# Altium PCB Mini_MP3.PcbDoc
Units mil, origin at the board's own origin, x right, y up, seen from the top; angles counter-clockwise.
Board outline 1320 x 1040 mil, 2 copper layers (Top Layer, Bottom Layer); 5 components, 5 nets, 23 pads, 0 vias.
Unrouted connection lines stored in the file: 2.
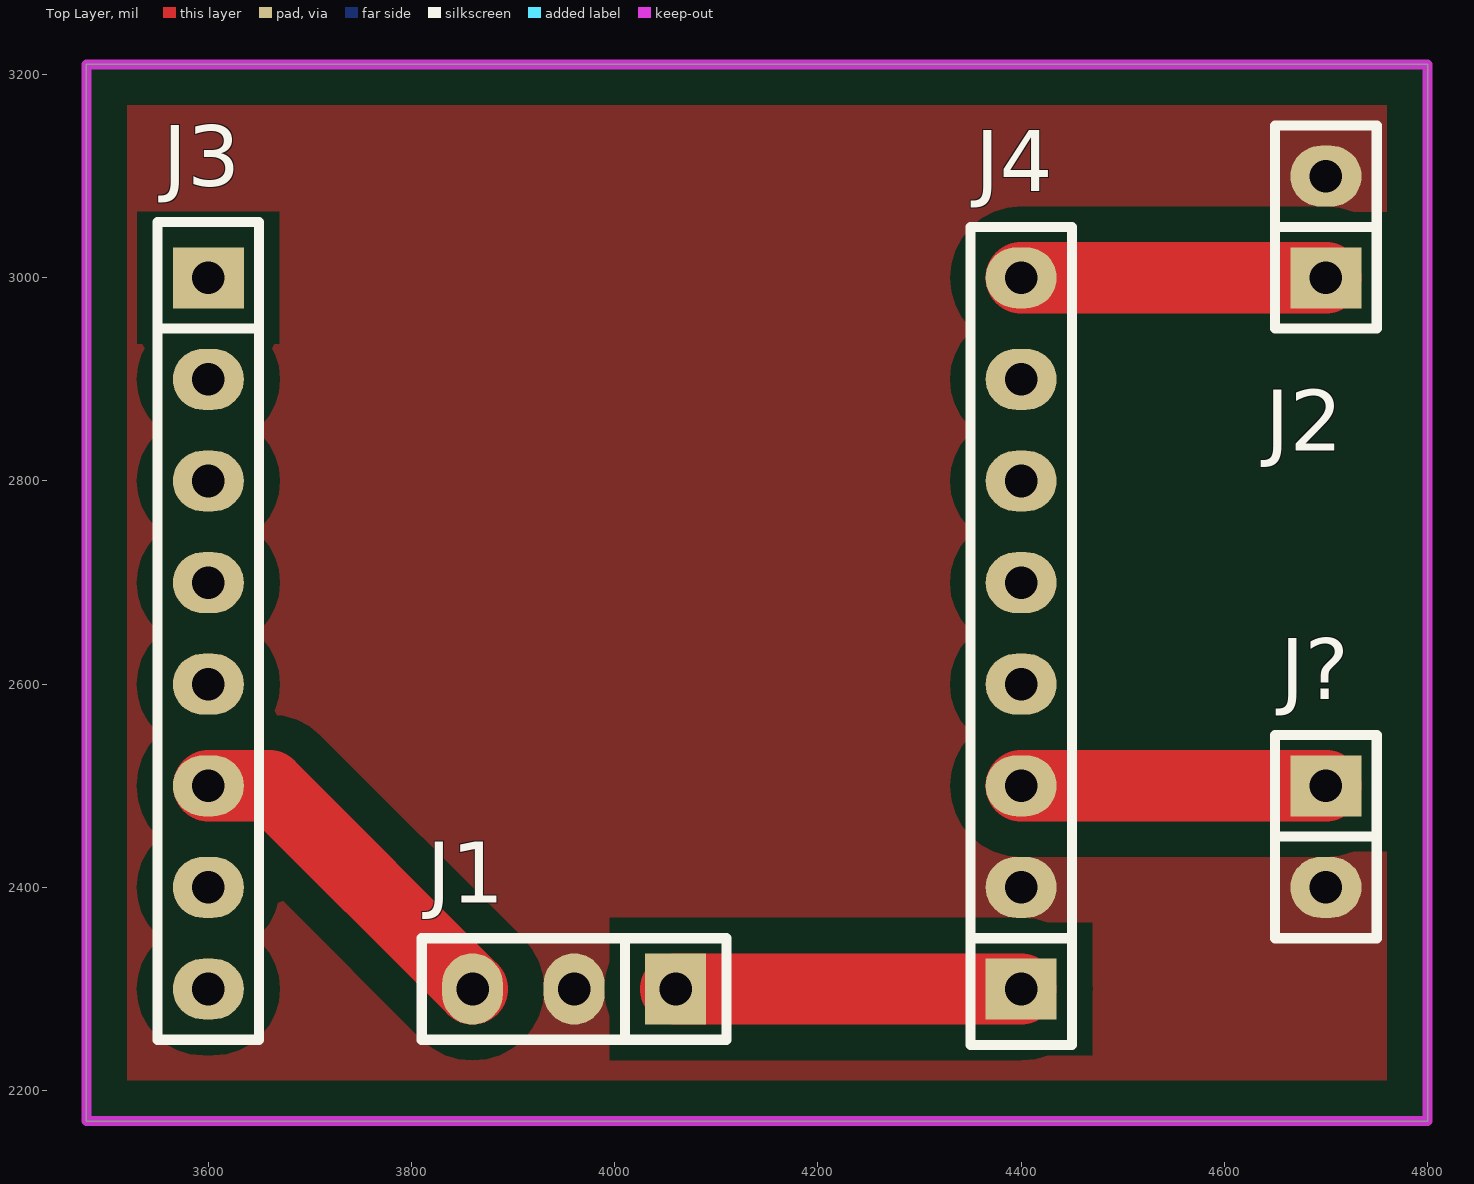
[diagram p0: Top Layer view]
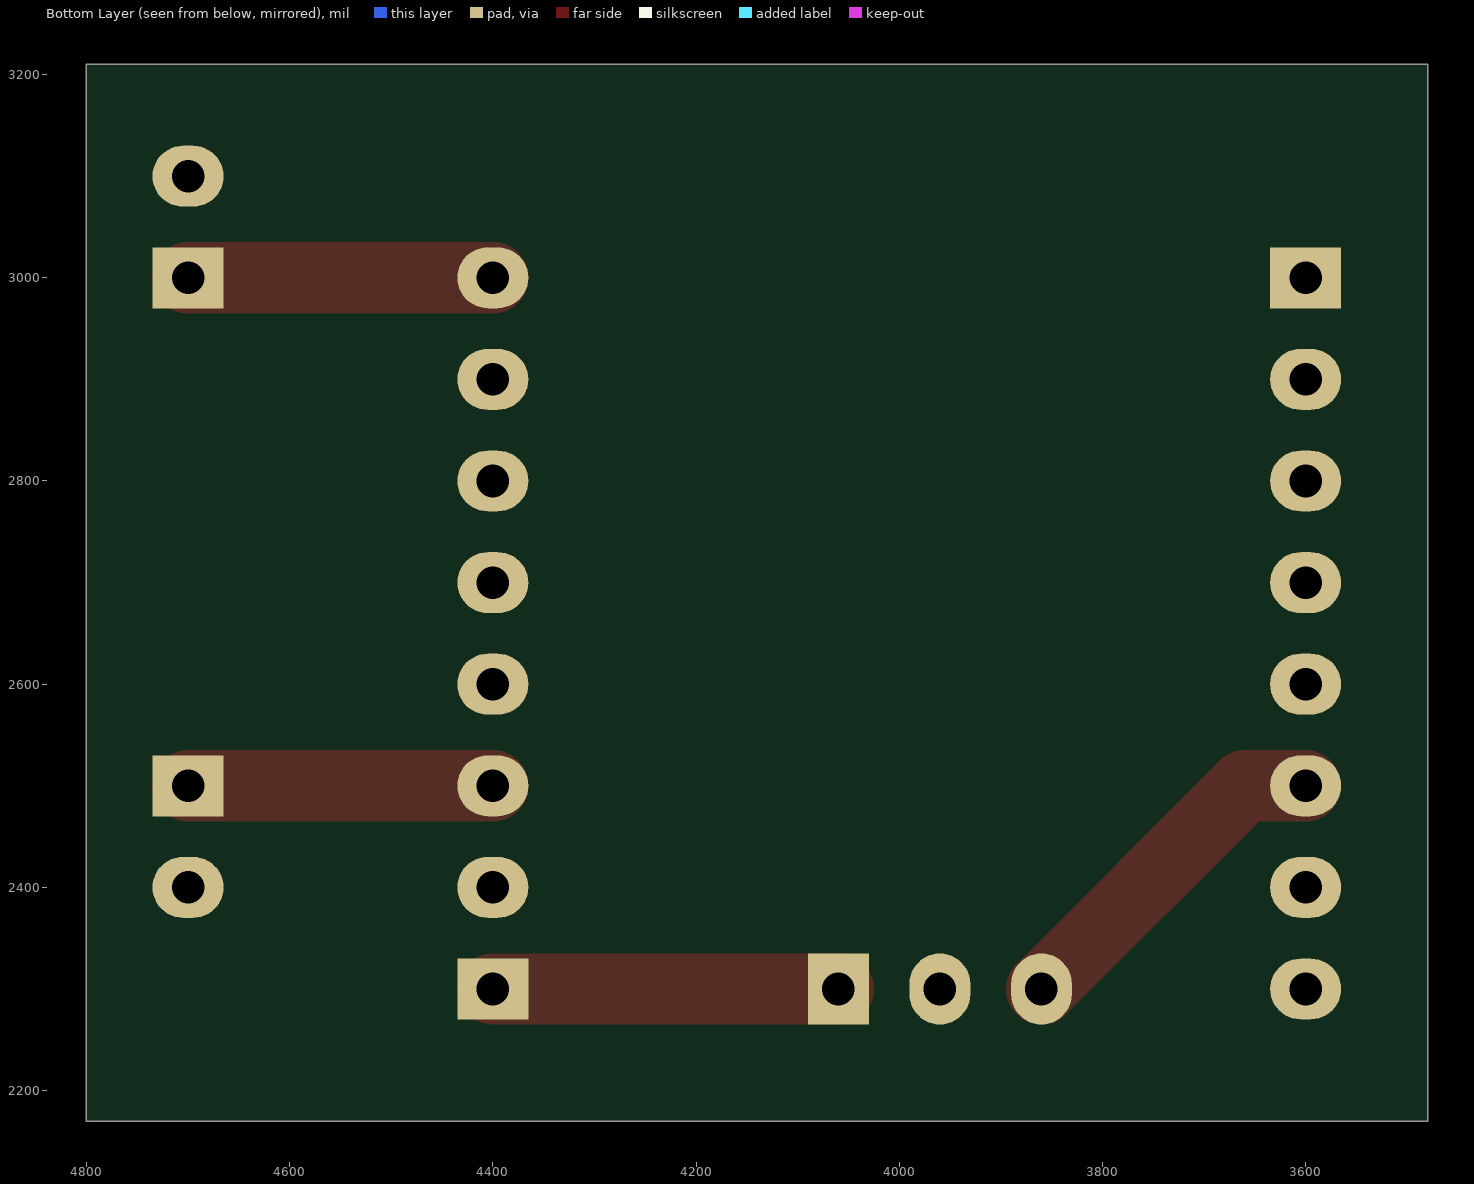
[diagram p1: Bottom Layer view, seen from below]
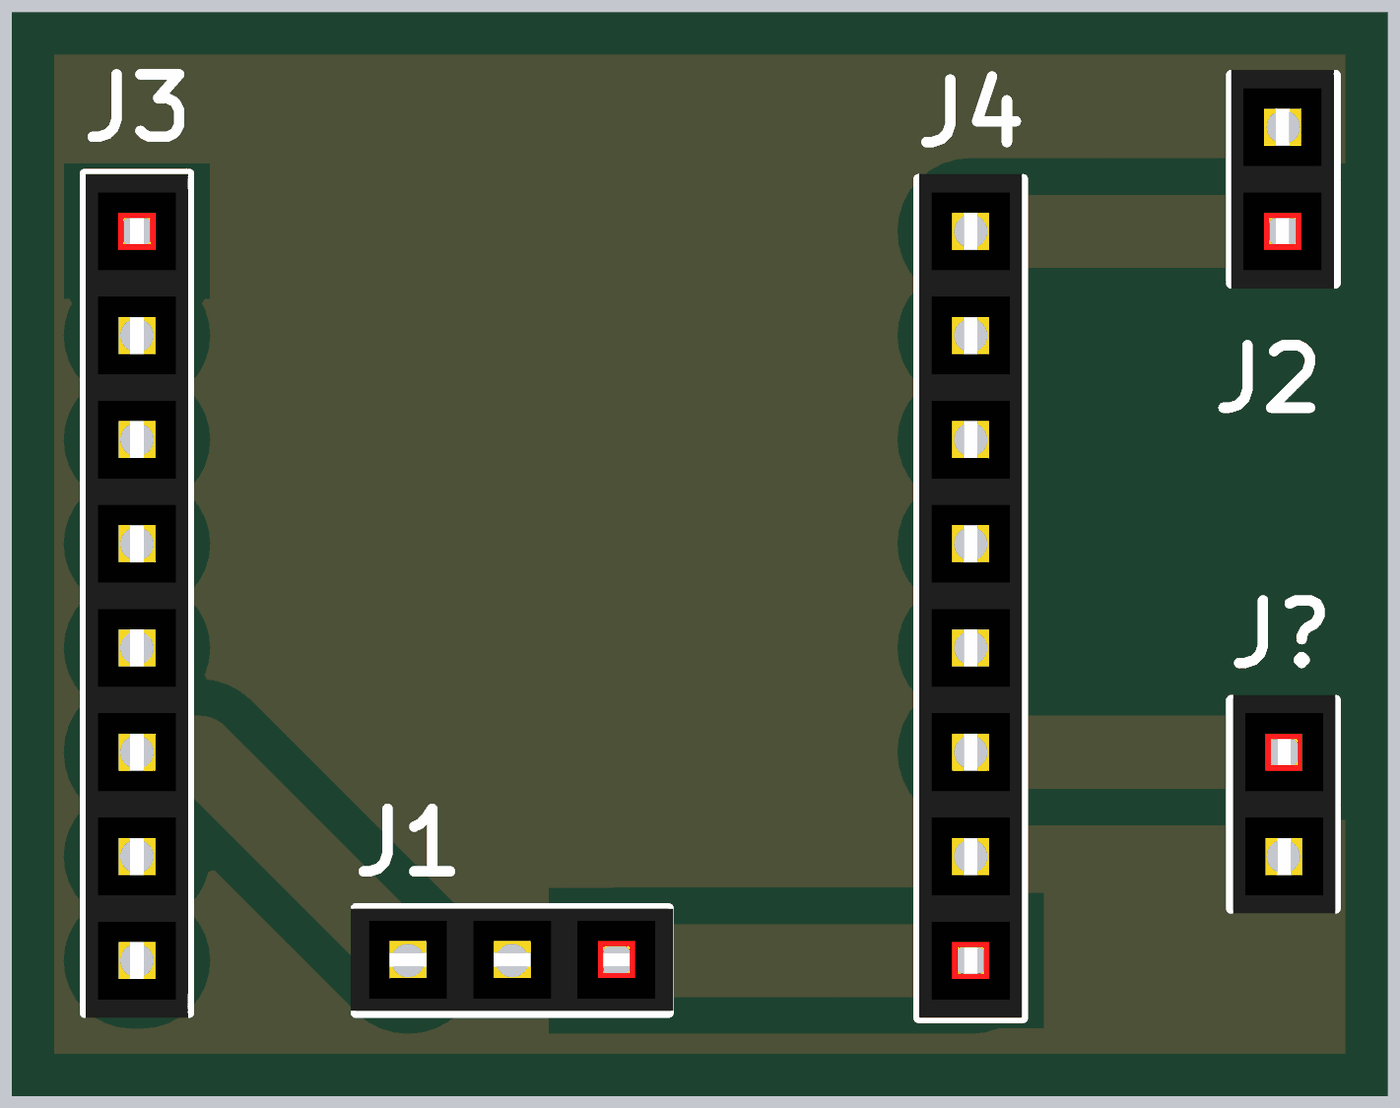
[diagram p2: 3D render of the assembled board from above, using the file's embedded part models]

## Layer stack, top to bottom
Top Solder: solder mask 0.4, Solder Resist, Dk 3.5
Top Layer: signal copper 1.4
Dielectric 1: dielectric 12.6, FR-4, Dk 4.8
Bottom Layer: signal copper 1.4
Bottom Solder: solder mask 0.4, Solder Resist, Dk 3.5

## Board outline
3480,2170 3480,3210 4800,3210 4800,2170

## Design rules (kind name [scope] priority, off if disabled: settings)
Clearance [All] p1: gap=35 ignorepadtopadclearanceinfootprint=FALSE
PolygonConnect [All] p1: connectstyle=Direct reliefconductorwidth=10 reliefentries=4 polygonreliefangle="90 Angle" airgapwidth=10
RoutingVias [All] p1: holewidth=28 width=50 viastyle="Through Hole" minholewidth=28 minwidth=50 maxholewidth=28 maxwidth=50
SolderMaskExpansion [All] p1: expansion=4 istentingtop=FALSE
Width [All] p1: maxlimit=70 minlimit=70 preferedwidth=70 minimp=50.000000 maximp=50.000000 favimp=50.000000
30 further rules are at their usual default settings.

## Components (designator, comment, footprint, x,y, rotation, side; value= is the part's Value field where it differs from the comment)
J1 "Female HDR1X3" Fe-HDR1X3/2.54-S 4060,2300 r270 top
J2 "Female HDR1X2" Fe-HDR1X2/2.54-S 4700,3000 r90 top
J3 "Female HDR1X8" Fe-HDR1X8/2.54-S 3600,3000 r0 top
J4 "Female HDR1X8" Fe-HDR1X8/2.54-S 4400,2300 r180 top
J? "Female HDR1X2" Fe-HDR1X2/2.54-S 4700,2500 r270 top

## Footprints (in the part's own frame and the unit in brackets; to place one, negate y for a bottom-side part, rotate by r counter-clockwise, add the part's x,y. Pads: shape width x height; smd on the part's side, far side on the other; paste and mask are expansions set on the pad)
Fe-HDR1X2/2.54-S [mil] "Connector; Header; 2x2 Position"
  rect 60x70 hole 32: 1(0,0)
  oval 60x70 hole 32: 2(100,0)
  silkscreen extent -50,-50 150,50, body extent -55,-48 155,50, height 335
Fe-HDR1X3/2.54-S [mil]
  rect 70x60 hole 32: 1(0,0)
  oval 70x60 hole 32: 2(0,-100) 3(0,-200)
  silkscreen extent -50,-250 50,50, body extent -50,-255 48,55, height 335
Fe-HDR1X8/2.54-S [mil]
  rect 70x60 hole 32: 1(0,0)
  oval 70x60 hole 32: 2(0,-100) 3(0,-200) 4(0,-300) 5(0,-400) 6(0,-500) 7(0,-600) 8(0,-700)
  silkscreen extent -50,-750 50,55, body extent -49,-755 49,55, height 126

## Nets (pads, with @x,y where several pads share a name; then routed paths per layer and width w, separated by ;. In a path a pad name is that pad's centre, name@x,y a point inside that pad or via, vN(x,y) a via of type N, cw(c..) or ccw(c..) an arc to the next point about the centre after c; other vN are vias at no path point)
3V3: J4.3 J?.1 | length 300
  Top Layer w70: J4.3 J?.1
+5: J1.1 J4.1 | length 340
  Top Layer w70: J1.1 J4.1
DL: J2.1 J4.8 | length 300
  Top Layer w70: J4.8 J2.1
drive: J1.3 J3.6 | length 342.8
  Top Layer w70: J3.6 3660,2500 J1.3
GND: J1.2 J2.2 J4.2 J?.2
pads on no net: J3.1 J3.2 J3.3 J3.4 J3.5 J3.7 J3.8 J4.4 J4.5 J4.6 J4.7

## Polygon pours and split planes (outlines as drawn)
GND on Top Layer "NONET_L-01_P-001" (solid, remove dead copper, pour order 0): 3480,3200 3490,3210 4800,3210 4800,2170 3480,2170

## Keep-outs
Top Layer:
  lines w10: 3480,2170 4800,2170 4800,3210 3480,3210 3480,3200 3480,2170